# Altium PCB F103.PcbDoc
Units mil, origin at the board's own origin, x right, y up, seen from the top; angles counter-clockwise.
Board outline 6000 x 4000 mil, 2 copper layers (Top Layer, Bottom Layer); 2 components, 0 nets, 78 pads, 0 vias.
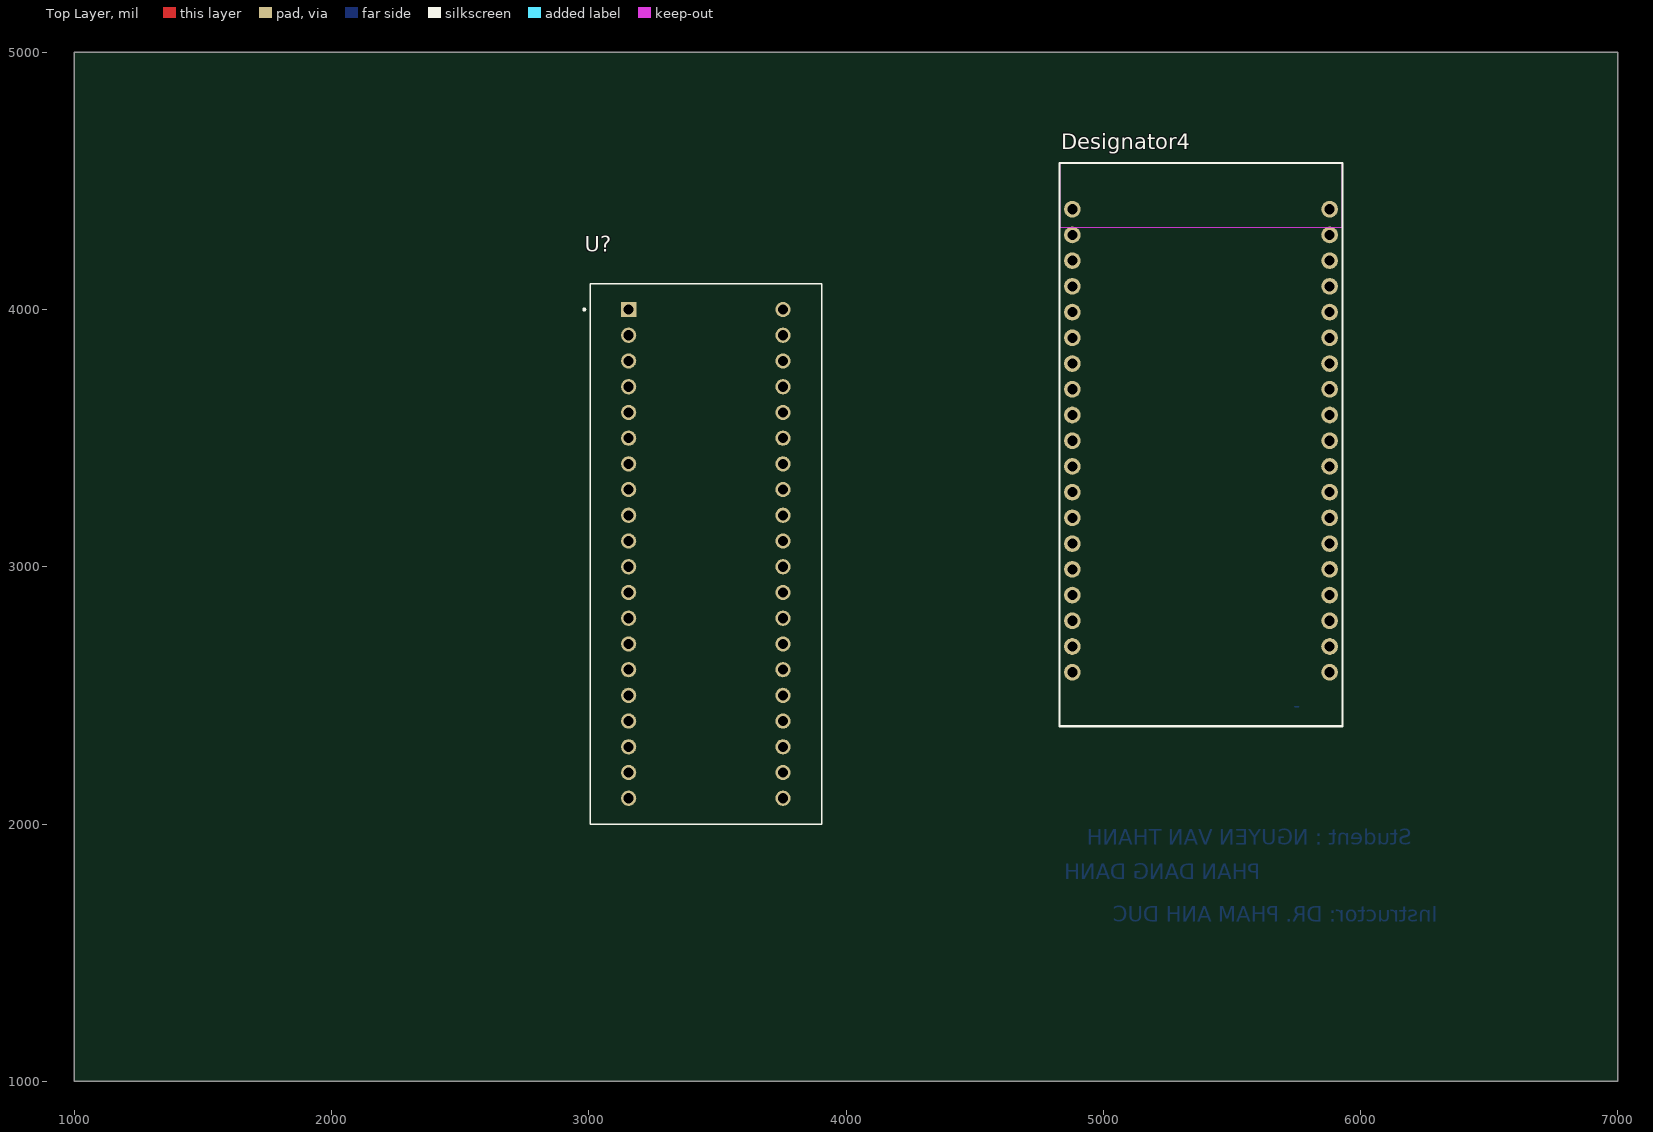
[diagram p0: Top Layer view]
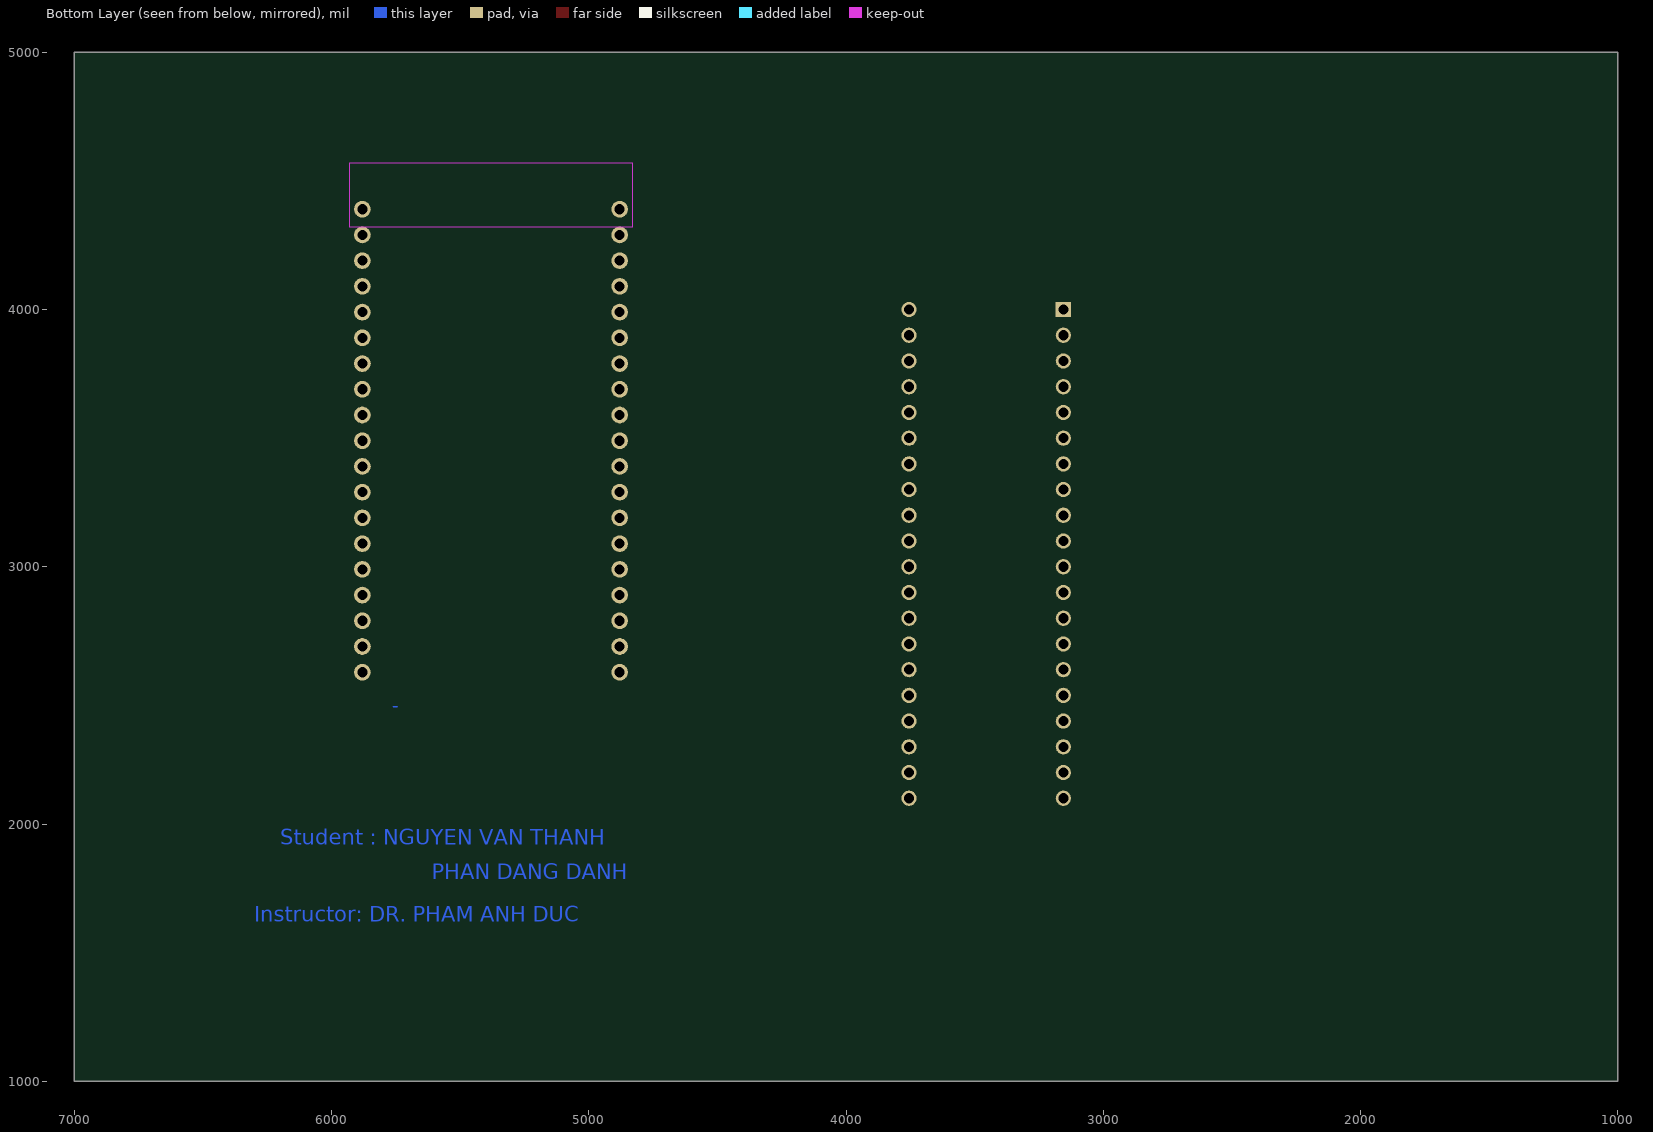
[diagram p1: Bottom Layer view, seen from below]

## Layer stack, top to bottom
Top Solder: solder mask 0.4, Solder Resist, Dk 3.5
Top Layer: signal copper 1.4
Dielectric 1: dielectric 12.6, FR-4, Dk 4.8
Bottom Layer: signal copper 1.4
Bottom Solder: solder mask 0.4, Solder Resist, Dk 3.5

## Board outline
1000,1000 7000,1000 7000,5000 1000,5000

## Design rules (kind name [scope] priority, off if disabled: settings)
Clearance [All] p1: gap=10 ignorepadtopadclearanceinfootprint=FALSE except(0: Arc-Hole Track-Hole SMDPad-Hole THPad-Hole Via-Hole Fill-Hole Poly-Hole Region-Hole Text-Hole)
PolygonConnect [All] p1: connectstyle=Relief reliefconductorwidth=10 reliefentries=4 polygonreliefangle="90 Angle" airgapwidth=10
RoomDefinition F103 [InComponentClass('F103')] p1: confinementstyle=ConfineIn formatcopy=TRUE lockcomponents=FALSE outline 2965,1980 3925,1980 3925,4305 2965,4305
RoutingVias [All] p1: holewidth=28 width=50 viastyle="Through Hole" minholewidth=28 minwidth=50 maxholewidth=28 maxwidth=50
SolderMaskExpansion [All] p1: expansion=4 istentingtop=FALSE
Width [All] p1: maxlimit=10 minlimit=10 preferedwidth=10
30 further rules are at their usual default settings.

## Classes and differential pairs
component class F103: U?

## Components (designator, comment, footprint, x,y, rotation, side; value= is the part's Value field where it differs from the comment)
Designator4 "Comment" "ESP32 NodeMCU" 5380,2380 r0 top
U? "ZC323000" MODULE_ZC323000 3455,3050 r0 top

## Footprints (in the part's own frame and the unit in brackets; to place one, negate y for a bottom-side part, rotate by r counter-clockwise, add the part's x,y. Pads: shape width x height; smd on the part's side, far side on the other; paste and mask are expansions set on the pad)
"ESP32 NodeMCU" [mm] "ESP32 NodeMCU LuaNode32 Module Thu Phát Wifi 38 Chân"
  round 1.65 hole 1: 1(-12.7,51.054) 2(-12.7,48.514) 3(-12.7,45.974) 4(-12.7,43.434) 5(-12.7,40.894) 6(-12.7,38.354) 7(-12.7,35.814) 8(-12.7,33.274) 9(-12.7,30.734) 10(-12.7,28.194) 11(-12.7,25.654) 12(-12.7,23.114) 13(-12.7,20.574) 14(-12.7,18.034) 15(-12.7,15.494) 16(-12.7,12.954) 17(-12.7,10.414) 18(-12.7,7.874) 19(-12.7,5.334) 20(12.7,5.334) 21(12.7,7.874) 22(12.7,10.414) 23(12.7,12.954) 24(12.7,15.494) 25(12.7,18.034) 26(12.7,20.574) 27(12.7,23.114) 28(12.7,25.654) 29(12.7,28.194) 30(12.7,30.734) 31(12.7,33.274) 32(12.7,35.814) 33(12.7,38.354) 34(12.7,40.894) 35(12.7,43.434) 36(12.7,45.974) 37(12.7,48.514) 38(12.7,51.054)
  Keep-Out Layer pour cut-out: -13.97,49.284 13.97,49.284 13.97,55.626 -13.97,55.626
  silkscreen extent -13.97,0 13.97,55.63, body extent -13.97,0 13.97,55.58, height 10.6
MODULE_ZC323000 [mm]
  rect 1.508x1.508 hole 1: 1(-7.62,24.13)
  round 1.508 hole 1: 2(-7.62,21.59) 3(-7.62,19.05) 4(-7.62,16.51) 5(-7.62,13.97) 6(-7.62,11.43) 7(-7.62,8.89) 8(-7.62,6.35) 9(-7.62,3.81) 10(-7.62,1.27) 11(-7.62,-1.27) 12(-7.62,-3.81) 13(-7.62,-6.35) 14(-7.62,-8.89) 15(-7.62,-11.43) 16(-7.62,-13.97) 17(-7.62,-16.51) 18(-7.62,-19.05) 19(-7.62,-21.59) 20(-7.62,-24.13) 21(7.62,-24.13) 22(7.62,-21.59) 23(7.62,-19.05) 24(7.62,-16.51) 25(7.62,-13.97) 26(7.62,-11.43) 27(7.62,-8.89) 28(7.62,-6.35) 29(7.62,-3.81) 30(7.62,-1.27) 31(7.62,1.27) 32(7.62,3.81) 33(7.62,6.35) 34(7.62,8.89) 35(7.62,11.43) 36(7.62,13.97) 37(7.62,16.51) 38(7.62,19.05) 39(7.62,21.59) 40(7.62,24.13)
  silkscreen extent -12.1,-26.67 11.43,26.67

## Part data
U?: "STM32F103C8T6 ARM STM32 Minimum System Development Board Module For Arduino", Package=None, Availability=Unavailable, MP=ZC323000, Price=None

## Nets (pads, with @x,y where several pads share a name; then routed paths per layer and width w, separated by ;. In a path a pad name is that pad's centre, name@x,y a point inside that pad or via, vN(x,y) a via of type N, cw(c..) or ccw(c..) an arc to the next point about the centre after c; other vN are vias at no path point)
pads on no net: Designator4.1 Designator4.2 Designator4.3 Designator4.4 Designator4.5 Designator4.6 Designator4.7 Designator4.8 Designator4.9 Designator4.10 Designator4.11 Designator4.12 Designator4.13 Designator4.14 Designator4.15 Designator4.16 Designator4.17 Designator4.18 Designator4.19 Designator4.20 Designator4.21 Designator4.22 Designator4.23 Designator4.24 Designator4.25 Designator4.26 Designator4.27 Designator4.28 Designator4.29 Designator4.30 Designator4.31 Designator4.32 Designator4.33 Designator4.34 Designator4.35 Designator4.36 Designator4.37 Designator4.38 U?.1 U?.2 U?.3 U?.4 U?.5 U?.6 U?.7 U?.8 U?.9 U?.10 U?.11 U?.12 U?.13 U?.14 U?.15 U?.16 U?.17 U?.18 U?.19 U?.20 U?.21 U?.22 U?.23 U?.24 U?.25 U?.26 U?.27 U?.28 U?.29 U?.30 U?.31 U?.32 U?.33 U?.34 U?.35 U?.36 U?.37 U?.38 U?.39 U?.40
copper on no net: | length 15.5
  Bottom Layer w6.5: 5743.93,2455.4 5759.43,2455.4

## Other copper
Bottom Layer:
  text "Student : NGUYEN VAN THANH" at 6200,1920 h60
  text "PHAN DANG DANH" at 5610,1785 h60
  text "Instructor: DR. PHAM ANH DUC" at 6300,1620 h60